# Altium PCB TelemetryBoard.PcbDoc
Units mm, origin at the board's own origin, x right, y up, seen from the top; angles counter-clockwise.
Board outline 136.75 x 63.75 mm, 4 copper layers (Top Layer, Internal Plane 1, Internal Plane 2, Bottom Layer), stack 1.57 mm thick; 63 components, 63 nets, 330 pads, 67 vias.
Unrouted connection lines stored in the file: 7.
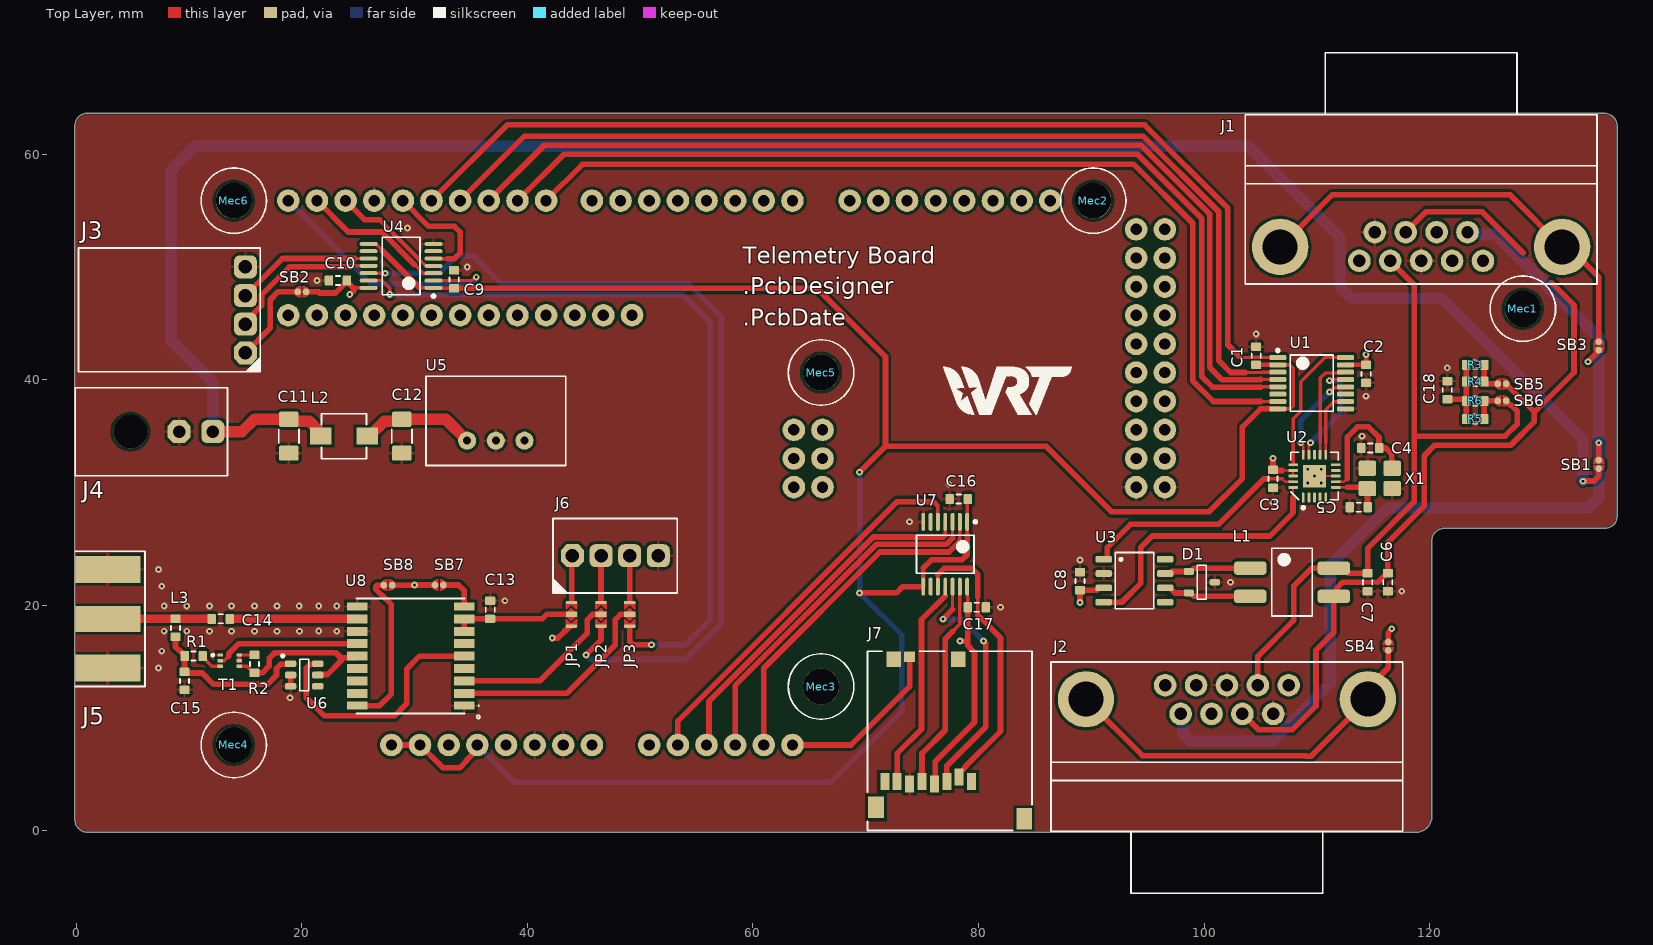
[diagram p0: Top Layer view]
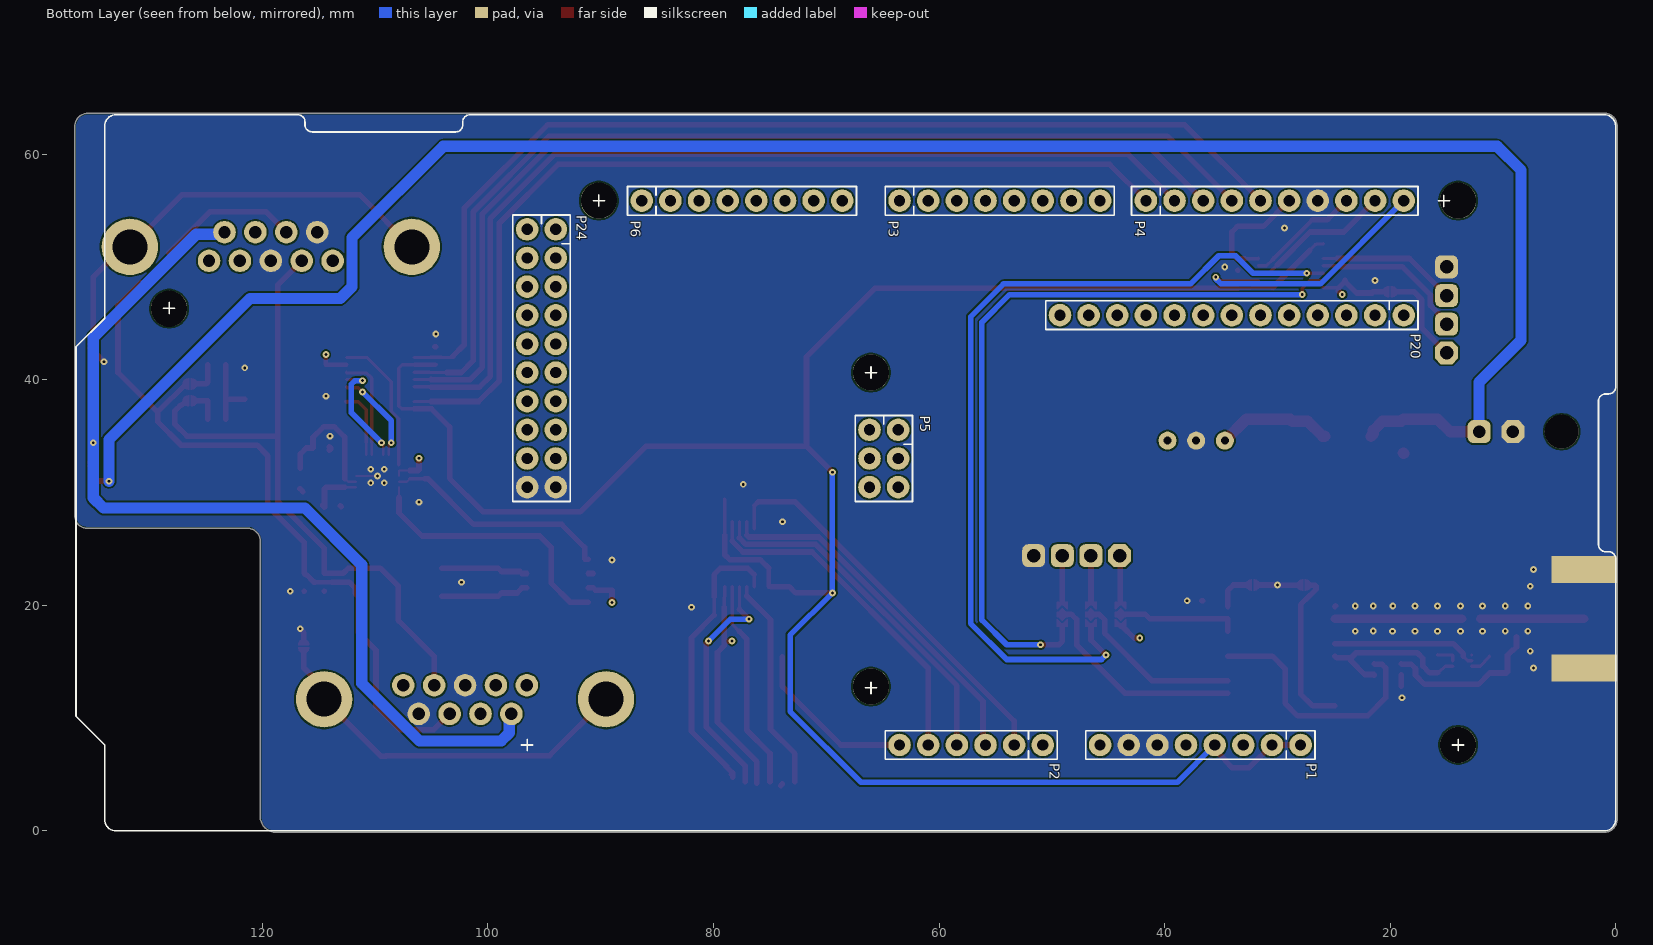
[diagram p1: Bottom Layer view, seen from below]
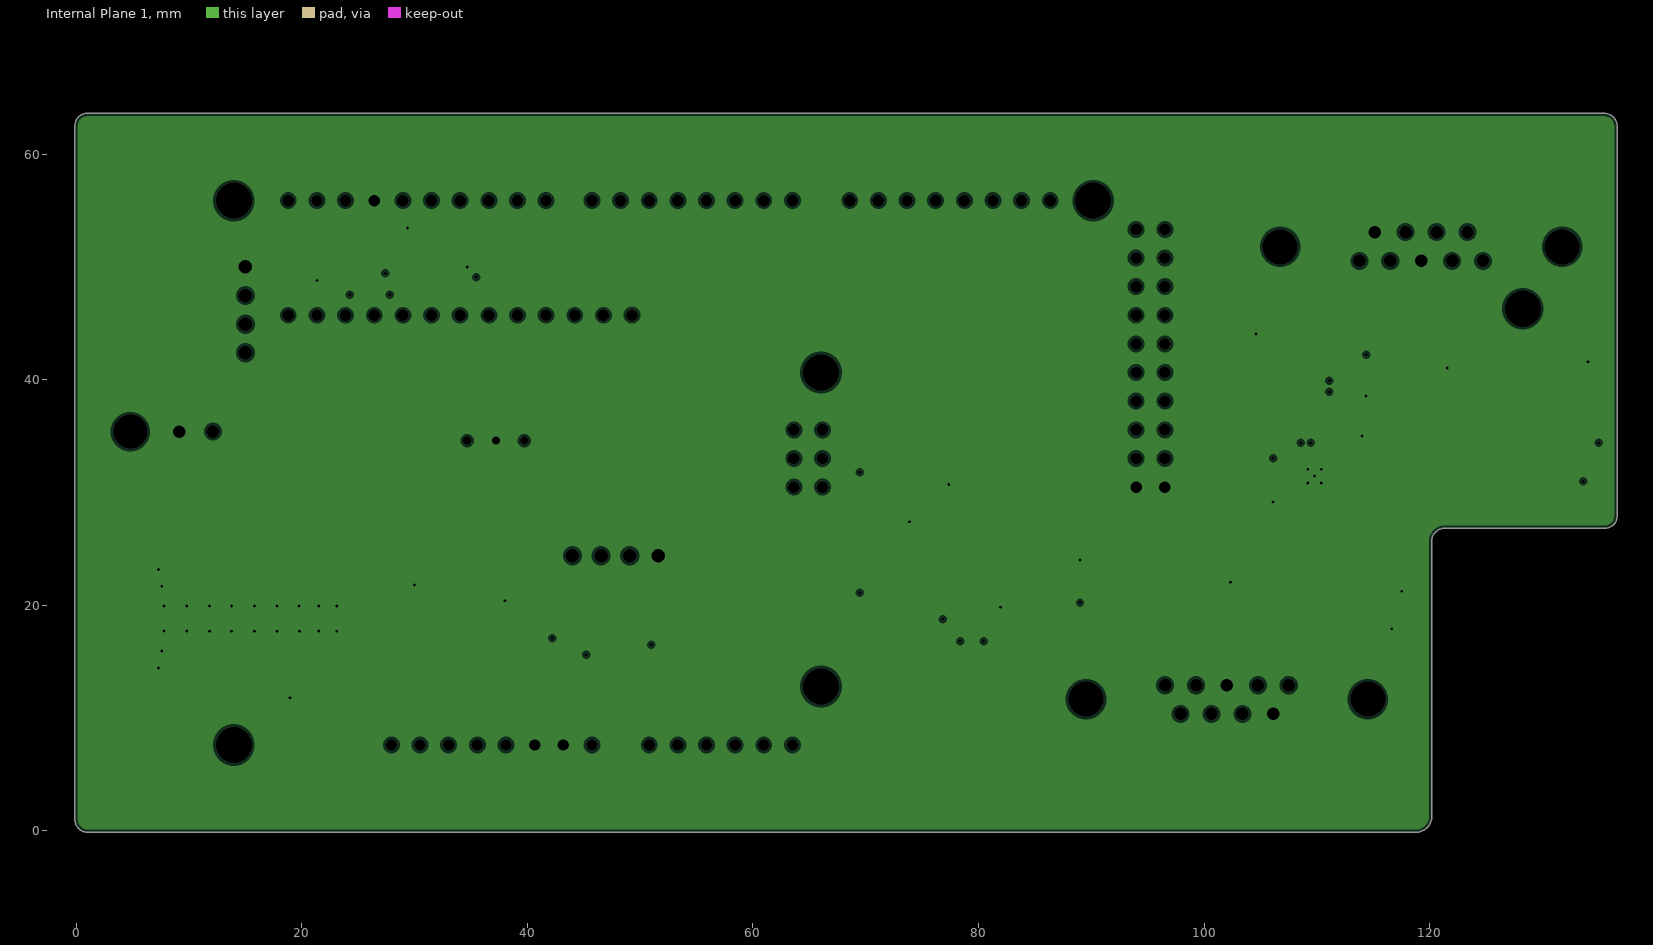
[diagram p2: Internal Plane 1, clearances drawn from the general rule]
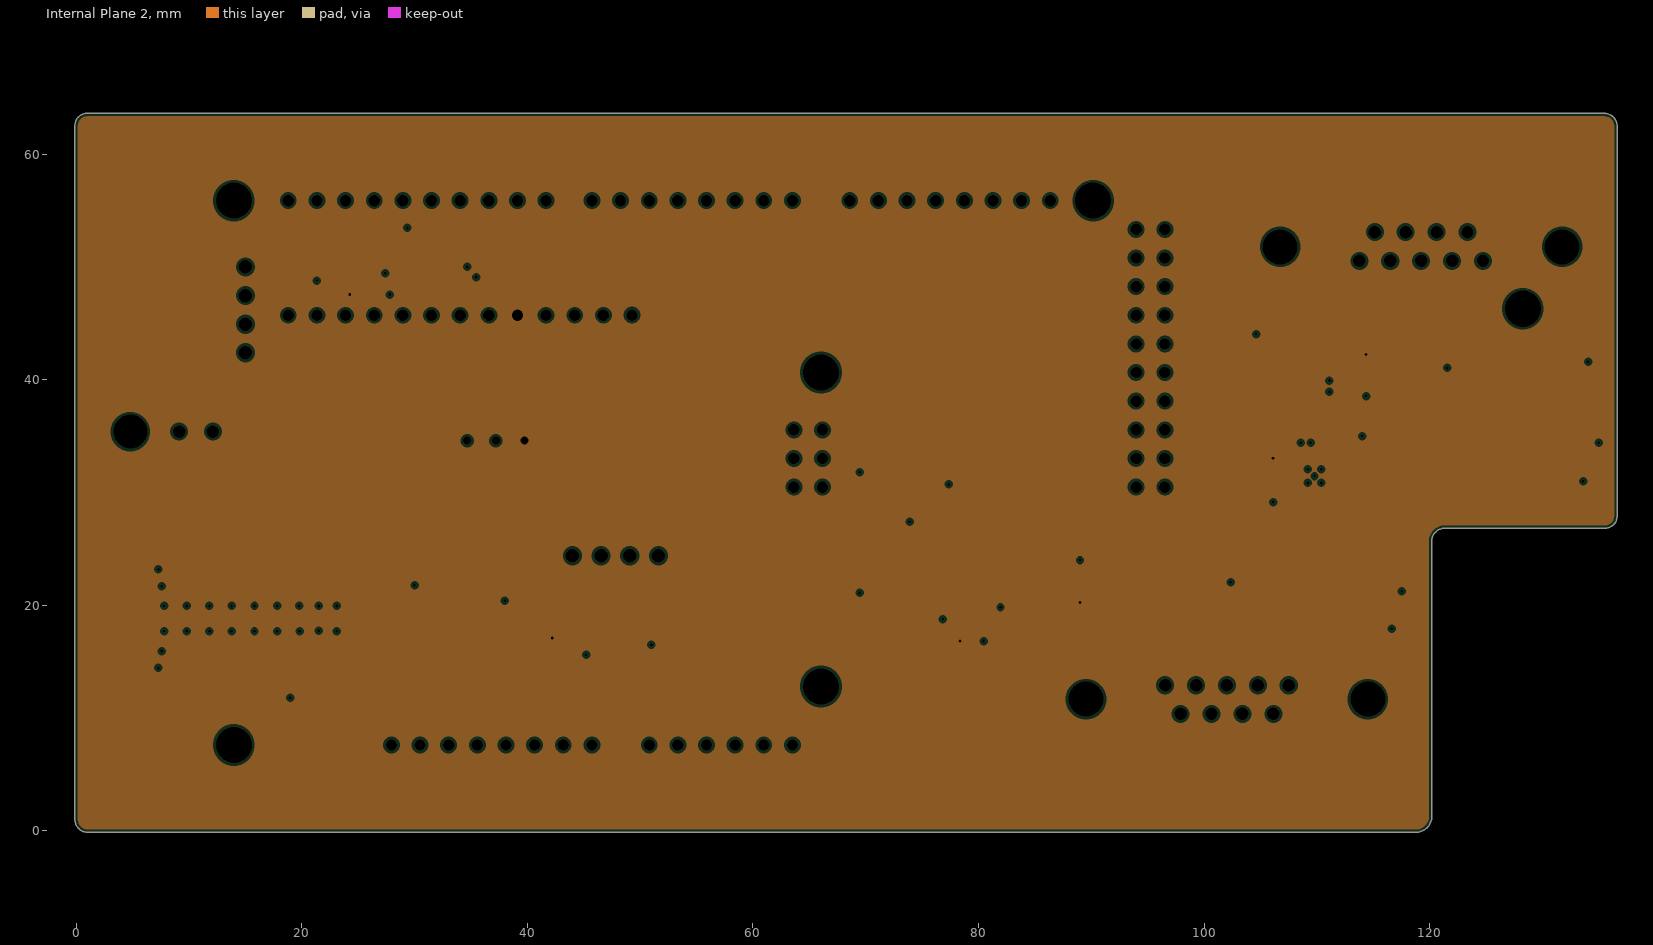
[diagram p3: Internal Plane 2, clearances drawn from the general rule]

## Layer stack, top to bottom
Top Solder: solder mask 0.01, Solder Resist, Dk 3.5
Top Layer: signal copper 0.035
Dielectric 1: prepreg 0.36, PR7826, Dk 4.32
Internal Plane 1: plane copper 0.035, net GND
Dielectric 3: core 0.71, FR-4, Dk 4.2
Internal Plane 2: plane copper 0.035, net +3.3
Dielectric 2: prepreg 0.36, PR7826, Dk 4.32
Bottom Layer: signal copper 0.035
Bottom Solder: solder mask 0.01, Solder Resist, Dk 3.5

## Board outline
1.016,-0.127 118.792,-0.127 ccw(c118.792,1.27) 120.189,1.27 120.189,25.686 cw(c121.332,25.686) 121.332,26.829 135.531,26.829 ccw(c135.531,27.925) 136.627,27.925 136.627,28.188 136.627,62.484 ccw(c136.5,62.484) 136.627,62.492 ccw(c136.501,62.5) 136.627,62.5 ccw(c135.5,62.5) 135.5,63.627 0.973,63.627 ccw(c0.973,62.527) -0.127,62.527 -0.127,1.016 ccw(c1.016,1.016)

## Design rules (kind name [scope] priority, off if disabled: settings)
AcuteAngle [All] p1 off: minimum=9.00000000000000E+0001 checktracksonly=TRUE
AssemblyTestPointUsage [All] p1 off:
AssemblyTestpoint [All] p1 off: testpointundercomponent=TRUE minsize=1.016 maxsize=2.54 preferedsize=1.524 minholesize=0 maxholesize=1.016 preferedholesize=0.813 testpointgrid=0.025 usegrid=TRUE gridtolerance=0 allowsidetop=TRUE allowsidebottom=TRUE
BoardOutlineClearance [All] p1 off: gap=0.25 ignorepadtopadclearanceinfootprint=FALSE
Clearance Clearance_2 [InNamedPolygon('GND_L01_P000')] p1: gap=0.254 ignorepadtopadclearanceinfootprint=FALSE except(0: Arc-Hole Track-Hole SMDPad-Hole THPad-Hole Via-Hole Fill-Hole Poly-Hole Region-Hole Text-Hole)
Clearance Clearance_1 [InNamedPolygon('GND_L01_P001')] p2: gap=0.254 ignorepadtopadclearanceinfootprint=FALSE except(0: Arc-Hole Track-Hole SMDPad-Hole THPad-Hole Via-Hole Fill-Hole Poly-Hole Region-Hole Text-Hole)
Clearance [All] p3: gap=0.15 ignorepadtopadclearanceinfootprint=FALSE except(0: Arc-Hole Track-Hole SMDPad-Hole THPad-Hole Via-Hole Fill-Hole Poly-Hole Region-Hole Text-Hole)
ComponentClearance [All] p1 off: gap=0.25 collisioncheckmode=3 verticalgap=0.25 showdistances=FALSE
DiffPairsRouting [All] p1 off: maxlimit=0.254 minlimit=0.254 mostfreqgap=0.254 toplayer_minwidth=0.381 toplayer_maxwidth=0.381 toplayer_prefwidth=0.381 bottomlayer_minwidth=0.381 bottomlayer_maxwidth=0.381 bottomlayer_prefwidth=0.381 maxuncoupledlength=12.7
FabricationTestPointUsage [All] p1 off: valid=0 allowmultiple=FALSE
FabricationTestpoint [All] p1 off: side=3 testpointundercomponent=TRUE minsize=1.016 maxsize=2.54 preferedsize=1.524 minholesize=0 maxholesize=1.016 preferedholesize=0.813 testpointgrid=0.025 allowsidetop=TRUE allowsidebottom=TRUE usegrid=TRUE gridtolerance=0
FanoutControl Fanout_BGA [IsBGA] p1 off: bgadir=Out bgaviamode=Centered fanoutstyle=Auto fanoutdirection=Alternating viagrid=0.025 // Fanout_BGA (Default Rule)
FanoutControl Fanout_LCC [IsLCC] p2 off: bgadir=Out bgaviamode=Centered fanoutstyle=Auto fanoutdirection=Alternating viagrid=0.025 // Fanout_LCC (Default Rule)
FanoutControl Fanout_SOIC [IsSOIC] p3 off: bgadir=Out bgaviamode=Centered fanoutstyle=Auto fanoutdirection=Alternating viagrid=0.025 // Fanout_SOIC (Default Rule)
FanoutControl Fanout_Small [(CompPinCount < 5)] p4 off: bgadir=Out bgaviamode=Centered fanoutstyle=Auto fanoutdirection=OutThenIn viagrid=0.025 // Fanout_Small (Default Rule)
FanoutControl Fanout_Default [All] p5 off: bgadir=Out bgaviamode=Centered fanoutstyle=Auto fanoutdirection=Alternating viagrid=0.025 // Fanout_Default (Default Rule)
Height [All] p1 off: minheight=0 maxheight=25.4 prefheight=12.7
HoleSize [All] p1: absolutevalues=TRUE maxlimit=3 minlimit=0.25 maxpercent=80.000 minpercent=20.000
HoleToHoleClearance [All] p1 off: gap=0.25 allowstackedmicrovias=TRUE
LayerPairs [All] p1 off: enforce=TRUE
MinimumAnnularRing [All] p1 off: minimumring=0.175
MinimumSolderMaskSliver [All] p1 off: minsoldermaskwidth=0
NetAntennae [All] p1 off: netantennaetolerance=0
PasteMaskExpansion [All] p1 off: expansion=0
PlaneClearance [All] p1: clearance=0.25
PlaneConnect [All] p1: planeconnectstyle=Direct reliefexpansion=0.5 reliefentries=4 reliefconductorwidth=0.25 reliefairgap=0.25
PolygonConnect PolygonConnect_7 [All vs IsNamedPolygon('GND_L04_P002')] p1: thpad.connectstyle=Relief thpad.reliefconductorwidth=0.254 thpad.reliefentries=4 thpad.polygonreliefangle="90 Angle" thpad.airgapwidth=0.254 smdpad.connectstyle=Relief smdpad.reliefconductorwidth=0.254 smdpad.reliefentries=4 smdpad.polygonreliefangle="90 Angle" smdpad.airgapwidth=0.254 via.connectstyle=Direct via.reliefconductorwidth=0.254 via.reliefentries=4 via.polygonreliefangle="90 Angle" via.airgapwidth=0.254
PolygonConnect PolygonConnect_6 [All vs IsNamedPolygon('GND_L01_P000')] p2: thpad.connectstyle=Relief thpad.reliefconductorwidth=0.254 thpad.reliefentries=4 thpad.polygonreliefangle="90 Angle" thpad.airgapwidth=0.254 smdpad.connectstyle=Relief smdpad.reliefconductorwidth=0.254 smdpad.reliefentries=4 smdpad.polygonreliefangle="90 Angle" smdpad.airgapwidth=0.254 via.connectstyle=Direct via.reliefconductorwidth=0.254 via.reliefentries=4 via.polygonreliefangle="90 Angle" via.airgapwidth=0.254
PolygonConnect PolygonConnect_5 [All vs IsNamedPolygon('GND_L01_P000')] p3: connectstyle=Relief reliefconductorwidth=0.254 reliefentries=4 polygonreliefangle="90 Angle" airgapwidth=0.254
PolygonConnect PolygonConnect_4 [All vs IsNamedPolygon('GND_L01_P000')] p4: thpad.connectstyle=Relief thpad.reliefconductorwidth=0.254 thpad.reliefentries=4 thpad.polygonreliefangle="90 Angle" thpad.airgapwidth=0.254 smdpad.connectstyle=Relief smdpad.reliefconductorwidth=0.254 smdpad.reliefentries=4 smdpad.polygonreliefangle="90 Angle" smdpad.airgapwidth=0.254 via.connectstyle=Direct via.reliefconductorwidth=0.254 via.reliefentries=4 via.polygonreliefangle="90 Angle" via.airgapwidth=0.254
PolygonConnect PolygonConnect_3 [All vs IsNamedPolygon('GND_L01_P001')] p5: thpad.connectstyle=Relief thpad.reliefconductorwidth=0.254 thpad.reliefentries=4 thpad.polygonreliefangle="90 Angle" thpad.airgapwidth=0.254 smdpad.connectstyle=Relief smdpad.reliefconductorwidth=0.254 smdpad.reliefentries=4 smdpad.polygonreliefangle="90 Angle" smdpad.airgapwidth=0.254 via.connectstyle=Direct via.reliefconductorwidth=0.254 via.reliefentries=4 via.polygonreliefangle="90 Angle" via.airgapwidth=0.254
PolygonConnect PolygonConnect_2 [All vs IsNamedPolygon('GND_L01_P001')] p6: thpad.connectstyle=Direct thpad.reliefconductorwidth=0.254 thpad.reliefentries=4 thpad.polygonreliefangle="90 Angle" thpad.airgapwidth=0.254 smdpad.connectstyle=Relief smdpad.reliefconductorwidth=0.254 smdpad.reliefentries=4 smdpad.polygonreliefangle="90 Angle" smdpad.airgapwidth=0.254 via.connectstyle=Relief via.reliefconductorwidth=0.254 via.reliefentries=4 via.polygonreliefangle="90 Angle" via.airgapwidth=0.254
PolygonConnect PolygonConnect_1 [All vs IsNamedPolygon('GND_L01_P001')] p7: connectstyle=Relief reliefconductorwidth=0.254 reliefentries=4 polygonreliefangle="90 Angle" airgapwidth=0.254
PolygonConnect [All] p8: connectstyle=Direct reliefconductorwidth=0.25 reliefentries=4 polygonreliefangle="90 Angle" airgapwidth=0.25
RoutingCorners [All] p1 off: cornerstyle=45-Degree minsetback=2.5 maxsetback=2.5
RoutingLayers [All] p1 off: top layer_v5=TRUE bottom layer_v5=TRUE
RoutingPriority [All] p1 off: routingpriority=0
RoutingTopology [All] p1 off: topology=Shortest
RoutingVias [All] p1: holewidth=0.25 width=0.6 viastyle="Through Hole" minholewidth=0.15 minwidth=0.5 maxholewidth=0.9 maxwidth=1.5 useviatemplates=TRUE viatemplateguid#1={857F750E-5D3C-416E-893E-D7E0D3E4223C} viatemplatename#1=v60h25m0mx0
SilkToBoardRegionClearance [All] p1 off:
SilkToSilkClearance [All] p1 off: silktosilkclearance=0
SilkToSolderMaskClearance [IsPad] p1 off: minsilkscreentomaskgap=0 clearancetoexposedcopper=TRUE
SolderMaskExpansion [All] p1: expansion=0 istentingtop=FALSE
Width [All] p1: maxlimit=4 minlimit=0.15 preferedwidth=0.5 minimp=50.000000 maximp=50.000000 favimp=50.000000
3 further rules are at their usual default settings.

## Classes and differential pairs
component class nRF7002-DK: C9 C10 C11 C12 J3 J4 L2 Mec1 Mec2 Mec3 Mec4 Mec5 Mec6 SB2 U4 U5
component class GPS-SD: C13 C14 C15 C16 C17 J5 J6 J7 JP1 JP2 JP3 L3 R1 R2 SB7 SB8 T1 U6 U7 U8
component class CanController: C1 C2 C3 C4 C5 C6 C7 C8 C18 D1 J1 J2 L1 R3 R4 R5 R6 SB1 SB3 SB4 SB5 SB6 U1 U2 U3 X1

## Components (designator, comment, footprint, x,y, rotation, side; value= is the part's Value field where it differs from the comment)
B1 "NRF52DK socket" "nRF5340DK SOCKET" 0,63.5 r0 bottom locked
C1 "100n" "CAPACITOR 1608 REFLOW" 104.618,42.123 r270 top
C2 "100n" "CAPACITOR 1608 REFLOW" 114.367,40.521 r90 top
C3 "100n" "CAPACITOR 1608 REFLOW" 106.118,31.223 r90 top
C4 "22pF" "CAPACITOR 1608 REFLOW" 114.738,33.948 r0 top
C5 "22pF" "CAPACITOR 1608 REFLOW" 113.717,28.7 r0 top
C6 "100pF" "CAPACITOR 1608 REFLOW" 116.3,22.048 r90 top
C7 "100pF" "CAPACITOR 1608 REFLOW" 114.5,22.048 r90 top
C8 "100n" "CAPACITOR 1608 REFLOW" 89,22.148 r270 top
C9 "100n" "CAPACITOR 1608 REFLOW" 33.5,48.9 r90 top
C10 "100n" "CAPACITOR 1608 REFLOW" 23.2,48.8 r0 top
C11 "10uF" "CAPACITOR 3216 REFLOW" 18.841,35 r270 top
C12 "10uF" "CAPACITOR 3216 REFLOW" 28.866,35 r270 top
C13 "100n" "CAPACITOR 1608 REFLOW" 36.7,19.6 r90 top
C14 "47pF" "CAPACITOR 1608 REFLOW" 12.8,18.8 r0 top
C15 "10nF" "CAPACITOR 1608 REFLOW" 9.6,13.3 r90 top
C16 "100n" "CAPACITOR 1608 REFLOW" 78.248,29.427 r0 top
C17 "100n" "CAPACITOR 1608 REFLOW" 79.848,19.827 r180 top
C18 "4.7nF" "CAPACITOR 1608 REFLOW" 121.57,39.086 r270 top
D1 "ESDCAN__-2BLY" "SOT23 P0.95 C1.6x3.0 H1.3" 99.8,22.048 r0 top
J1 "D-SUB 9 MALE GROUNDED" "D-SUB 9 MALE ANGLE" 119.249,55.987 r90 top
J2 "D-SUB 9 MALE GROUNDED" "D-SUB 9 MALE ANGLE" 102.029,7.474 r270 top
J3 "MOLEX 22057048" "MOLEX 22057048" 15,46.2 r270 top
J4 "MOLEX 43045-0200" "MOLEX 43045-0200" 10.615,35.4 r270 top
J5 "732511150" "SMA EDGE Molex 732511150" -0.1,18.8 r0 top locked
J6 "MOLEX 22272041" "MOLEX 22272041" 47.8,24.4 r180 top
J7 "GTC MEM20_1-00-195-00-A" "SD MICRO GCT MEM2051-00-195-00-A" 77.448,8.027 r0 top
JP1 "{Value}" "JUMPER3 SMD 1608" 43.9,19.2 r90 top
JP2 "{Value}" "JUMPER3 SMD 1608" 46.53,19.2 r90 top
JP3 "{Value}" "JUMPER3 SMD 1608" 49.07,19.2 r90 top
L1 "*" "L CM 2X B82793C EPCOS" 107.8,22.048 r0 top
L2 "*" TCK141 23.741,35 r0 top
L3 "27nH" "INDUCTOR 1608 REFLOW" 8.8,18 r90 top
Mec1 "" "Screw Hex Socket M3X5 Unconnected" 128.27,46.3 r0 top locked
Mec2 "" "Screw Hex Socket M3X5 Unconnected" 90.17,55.88 r0 top locked
Mec3 "" "Screw Hex Socket M3X5 Unconnected" 66.04,12.8 r0 top locked
Mec4 "" "Screw Hex Socket M3X5 Unconnected" 13.97,7.62 r0 top locked
Mec5 "" "Screw Hex Socket M3X5 Unconnected" 66.04,40.64 r0 top locked
Mec6 "" "Screw Hex Socket M3X5 Unconnected" 13.97,55.88 r0 top locked
R1 "10" "RESISTOR 1608 REFLOW" 10.4,15.5 r180 top
R2 "100k" "RESISTOR 1608 REFLOW" 15.8,14.809 r90 top
R3 "120" "RESISTOR 1608 REFLOW" 124.046,41.323 r0 top
R4 "120" "RESISTOR 1608 REFLOW" 124.046,39.836 r0 top
R5 "120" "RESISTOR 1608 REFLOW" 124.046,36.524 r0 top
R6 "120" "RESISTOR 1608 REFLOW" 124.046,38.124 r0 top
SB1 "*" "Solder Bridge 1mm Unconnected" 135,32.5 r90 top net-tie
SB2 "*" "Solder Bridge 1mm Unconnected" 20,47.8 r0 top net-tie
SB3 "*" "Solder Bridge 1mm Unconnected" 135,43 r90 top net-tie
SB4 "*" "Solder Bridge 1mm Unconnected" 116.329,16.374 r270 top net-tie
SB5 "*" "Solder Bridge 1mm Unconnected" 126.41,39.636 r0 top net-tie
SB6 "*" "Solder Bridge 1mm Unconnected" 126.41,38.131 r0 top net-tie
SB7 "*" "Solder Bridge 1mm Unconnected" 32.175,21.8 r0 top net-tie
SB8 "*" "Solder Bridge 1mm Unconnected" 27.647,21.791 r0 top net-tie
T1 "Si1016X" "SOT563F P0.5 C1.6x1.2 H0.6" 13.6,15.1 r0 top
U1 "TXB0106PWR" "TSSOP16 P0.65 C5.0x4.5 H1.1" 109.543,39.696 r0 top
U2 "MCP2515I/ML" "QFN20 P0.5 T2.05x2.05 C4.0x4.0 H0.85" 109.792,31.46 r90 top
U3 "SN65HVD232D" "SO8 P1.27 C4.0X5.0 H1.75" 93.825,22.183 r0 top
U4 "TXB0104PWR" "TSSOP14 P0.65 C4.4x5.0 H1.1" 28.8,50.1 r180 top
U5 "*" "TRACO TSR 1" 37.2,34.6 r0 top
U6 "SN74LVC2G17" "SOT23-6 P0.95 C1.5x3.0 H1.3" 20.204,13.819 r0 top
U7 "TXB0104PWR" "TSSOP14 P0.65 C4.4x5.0 H1.1" 77.048,24.527 r270 top
U8 "MAX-M10S-00B" MAXM10S00B 29.65,15.5 r0 top
X1 "*" "CRYSTAL C3.2x2.5 Kyocera CX3225SB" 115.578,31.248 r0 top

## Footprints (in the part's own frame and the unit in brackets; to place one, negate y for a bottom-side part, rotate by r counter-clockwise, add the part's x,y. Pads: shape width x height; smd on the part's side, far side on the other; paste and mask are expansions set on the pad)
"CAPACITOR 1608 REFLOW" [mm] "Capacitor SMD 1.6x0.8mm (0603-imperial)"
  rrect25% 0.75x0.9 smd: 1(-0.8,0) 2(0.8,0)
  silkscreen extent -0.2,-0.4 0.2,0.4, body extent -0.8,-0.4 0.8,0.4, height 0.8
"CAPACITOR 3216 REFLOW" [mm] "Capacitor SMD 3.2x1.6mm (1206-imperial)"
  rrect25% 1.35x1.75 smd: 1(-1.5,0) 2(1.5,0)
  silkscreen extent -0.6,-0.9 0.6,0.9, body extent -1.7,-0.9 1.7,0.9, height 1.6
"CRYSTAL C3.2x2.5 Kyocera CX3225SB" [mm] "CRYSTAL C3.2x2.5 Kyocera CX3225SB"
  rrect25% 1.55x1.35 smd: 1(-1.1,-0.9) 2(1.1,-0.9) 3(1.1,0.9) 4(-1.1,0.9)
  body extent -1.6,-1.3 1.6,1.3, height 0.6
"D-SUB 9 MALE ANGLE" [mm] "D-SUB9M HARTING"
  round 2 hole 1.1: 1(-5.44,-5.48) 2(-5.44,-2.74) 3(-5.44,0) 4(-5.44,2.74) 5(-5.44,5.48) 6(-2.9,-4.11) 7(-2.9,-1.37) 8(-2.9,1.37) 9(-2.9,4.11)
  round 5 hole 3.1: 10(-4.2,12.5) 11(-4.2,-12.5)
  silkscreen extent -7.5,-15.6 13,15.6, body extent -7.4,-15.6 13.8,15.6, height 13.65
"INDUCTOR 1608 REFLOW" [mm] "Inductor SMD 1.6x0.8mm (0603-imperial)"
  rrect25% 0.75x0.9 smd: 1(-0.8,0) 2(0.8,0)
  silkscreen extent -0.2,-0.4 0.2,0.4, body extent -0.8,-0.4 0.8,0.4, height 0.45
"JUMPER3 SMD 1608" [mm] "JUMPER SMD 3LEADS 1608 (0603-Imperial)"
  rrect50% 0.3x1 smd paste-0.8 mask-0.5: 1(-1.05,0) 3(1.05,0)
  rect 0.5x1 smd paste-0.8 mask-0.5: 2(0,0)
  Top Layer region: -1.1,0.5 -1.1,-0.5 -0.45,-0.5 -0.45,-0.4 -0.8,-0.05 -0.8,0.05 -0.45,0.4 -0.45,0.5
  Top Layer region: -0.25,0.35 -0.625,0 -0.25,-0.35 -0.25,-0.5 0.25,-0.5 0.25,-0.35 0.6,0 0.25,0.35 0.25,0.5 0.1,0.5 -0.25,0.5
  Top Layer region: 1.1,-0.5 1.1,0.5 0.45,0.5 0.45,0.4 0.8,0.05 0.8,-0.05 0.45,-0.4 0.45,-0.5
"L CM 2X B82793C EPCOS" [mm]
  rrect50% 2.9x1.2 smd: 1(-3.7,1.25) 2(-3.7,-1.25) 3(3.7,-1.25) 4(3.7,1.25)
  silkscreen extent -1.8,-3 1.8,3, body extent -3.55,-3 3.55,3, height 4.9
MAXM10S00B [mm]
  rect 1.8x0.7 smd: 1(4.75,-4.4) 9(4.75,4.4) 10(-4.75,4.4) 18(-4.75,-4.4)
  rect 1.8x0.8 smd: 2(4.75,-3.3) 3(4.75,-2.2) 4(4.75,-1.1) 5(4.75,0) 6(4.75,1.1) 7(4.75,2.2) 8(4.75,3.3) 11(-4.75,3.3) 12(-4.75,2.2) 13(-4.75,1.1) 14(-4.75,0) 15(-4.75,-1.1) 16(-4.75,-2.2) 17(-4.75,-3.3)
  silkscreen extent -4.8,-5.54 6.14,5.1, body extent -4.85,-5.05 4.85,5.05, height 2.5
"MOLEX 43045-0200" [mm] "Micro-Fit 3.0 Right Angle Header, 3.00mm Pitch, Dual Row, 2 Circuits"
  round 3 hole 3 unplated paste-25.4 mask-25.4: 0(0,-5.82)
  oct 2.032x2.032 hole 1.1: 1(0,-1.5)
  rrect50% 2.032x2.032 hole 1.1: 2(0,1.5)
  silkscreen extent -3.9,-10.7 3.9,2.8, body extent -3.57,-10.45 3.58,1.79, height 8.78
"MOLEX 22057048" [mil] "KK 254 Wire-to-Board Header, Right-Angle, 4 Circuits"
  oct 80x80 hole 47.24: 1(150,0)
  rrect50% 80x80 hole 47.24: 2(50,0) 3(-50,0) 4(-150,0)
  silkscreen extent -216,-583 216,51, body extent -200,-567 200,13, height 231
"MOLEX 22272041" [mil] "KK 254 Wire-to-Board Header, Vertical, 4 Circuits"
  oct 80x80 hole 47.24: 1(150,0)
  rrect50% 80x80 hole 47.24: 2(50,0) 3(-50,0) 4(-150,0)
  silkscreen extent -216,-130 218,130, body extent -200,-114 200,114, height 461
"nRF5340DK SOCKET" [mm] "nRF5340DK Dongle socket"
  round 2 hole 1: P1.1(27.941,55.88) P1.2(30.48,55.88) P1.3(33.021,55.88) P1.4(35.56,55.88) P1.5(38.101,55.88) P1.6(40.641,55.88) P1.7(43.181,55.88) P1.8(45.721,55.88) P2.1(50.801,55.88) P2.2(53.34,55.88) P2.3(55.881,55.88) P2.4(58.42,55.88) P2.5(60.961,55.88) P2.6(63.501,55.88) P3.1(63.501,7.62) P3.2(60.961,7.62) P3.3(58.421,7.62) P3.4(55.881,7.62) P3.5(53.341,7.62) P3.6(50.8,7.62) P3.7(48.26,7.62) P3.8(45.72,7.62) P4.1(41.657,7.62) P4.2(39.117,7.62) P4.3(36.577,7.62) P4.4(34.037,7.62) P4.5(31.497,7.62) P4.6(28.957,7.62) P4.7(26.417,7.62) P4.8(23.877,7.62) P4.9(21.336,7.62) P4.10(18.796,7.62) P5.1(63.627,27.94) P5.2(66.167,27.94) P5.3(63.627,30.48) P5.4(66.167,30.48) P5.5(63.627,33.02) P5.6(66.167,33.02) P6.1(86.361,7.62) P6.2(83.821,7.62) P6.3(81.281,7.62) P6.4(78.741,7.62) P6.5(76.201,7.62) P6.6(73.661,7.62) P6.7(71.121,7.62) P6.8(68.581,7.62) P20.1(18.797,17.78) P20.2(21.337,17.78) P20.3(23.877,17.78) P20.4(26.417,17.78) P20.5(28.957,17.78) P20.6(31.497,17.78) P20.7(34.037,17.78) P20.8(36.577,17.78) P20.9(39.117,17.78) P20.10(41.657,17.78) P20.11(44.197,17.78) P20.12(46.737,17.78) P20.13(49.277,17.768) P24.1(93.98,10.16) P24.2(96.52,10.16) P24.3(93.98,12.7) P24.4(96.52,12.7) P24.5(93.98,15.24) P24.6(96.52,15.24) P24.7(93.98,17.78) P24.8(96.52,17.78) P24.9(93.98,20.32) P24.10(96.52,20.32) P24.11(93.98,22.86) P24.12(96.52,22.86) P24.13(93.98,25.4) P24.14(96.52,25.4) P24.15(93.98,27.94) P24.16(96.52,27.94) P24.17(93.98,30.48) P24.18(96.52,30.48) P24.19(93.98,33.02) P24.20(96.52,33.02)
  silkscreen extent 0,0 136.53,63.5, body extent 17.53,6.35 97.79,57.15, height 8.5
"QFN20 P0.5 T2.05x2.05 C4.0x4.0 H0.85" [mm] "QFN20 P0.5 T2.05x2.0 C4.0x4.0 H0.85"
  rrect50% 0.85x0.25 smd: 1(-1.9,1) 2(-1.9,0.5) 3(-1.9,0) 4(-1.9,-0.5) 5(-1.9,-1) 11(1.9,-1) 12(1.9,-0.5) 13(1.9,0) 14(1.9,0.5) 15(1.9,1)
  rrect50% 0.25x0.85 smd: 6(-1,-1.9) 7(-0.5,-1.9) 8(0,-1.9) 9(0.5,-1.9) 10(1,-1.9) 16(1,1.9) 17(0.5,1.9) 18(0,1.9) 19(-0.5,1.9) 20(-1,1.9)
  rect 2x2 smd: 21(0,0)
  silkscreen extent -2.92,-2.1 2.1,2.1, body extent -2,-2 2,2, height 0.86
"RESISTOR 1608 REFLOW" [mm] "Resistor SMD 1.6x0.8mm (0603-imperial)"
  rrect25% 0.75x0.9 smd: 1(-0.8,0) 2(0.8,0)
  silkscreen extent -0.2,-0.4 0.2,0.4, body extent -0.77,-0.42 0.78,0.43, height 0.45
"Screw Hex Socket M3X5 Unconnected" [mm] "Screw Hex Socket M3X5 Unconnected BN610"
  round 3.2 hole 3.2 unplated paste+0 mask+0: 0(0,0)
  silkscreen extent -2.9,-2.9 2.9,2.9, body extent -2.75,-2.75 2.75,2.75, height 3.01
"SD MICRO GCT MEM2051-00-195-00-A" [mm] "SD MICRO GCT MEM2051-00-195-00-A"
  rect 1.4x1.9 smd: 0(-6.55,-5.95) 0(6.6,-6.95)
  rect 1.3x1.4 smd: 0(-4.95,7.2) 0(0.75,7.2)
  rect 0.8x1.5 smd: 1(1.94,-3.66) 2(0.84,-3.26) 3(-0.26,-3.66) 4(-1.36,-3.86) 5(-2.46,-3.66) 6(-3.56,-3.86) 7(-4.66,-3.66) 8(-5.76,-3.66)
  rect 1x0.95 smd: 9(-3.56,7.425)
  silkscreen extent -7.3,-8 7.3,7.9, body extent -7.05,-11.27 7.05,7.57, height 2
"SMA EDGE Molex 732511150" [mm] "Connector SMA, Board edge mount, SMA EDGE Molex 732511150"
  rect 5.8x2.3 smd: 1(2.9,0)
  rect 5.8x2.4 smd: 2(2.9,-4.35) 2(2.9,4.38)
  rect 5.8x2.4 smd far side: 2(2.9,-4.35) 2(2.9,4.38)
  silkscreen extent 0,-6 6.2,6, body extent -9.6,-4.76 4.67,4.76, height 4.36
"SO8 P1.27 C4.0X5.0 H1.75" [mm] "8-Pin Small Outline Integrated Circuit 1.27 mm Pitch, IPC Medium Density"
  rrect50% 1.45x0.6 smd: 1(-2.725,1.905) 2(-2.725,0.635) 3(-2.725,-0.635) 4(-2.725,-1.905) 5(2.725,-1.905) 6(2.725,-0.635) 7(2.725,0.635) 8(2.725,1.905)
  silkscreen extent -1.7,-2.5 1.7,2.5, body extent -3,-2.45 3,2.45, height 1.75
"Solder Bridge 1mm Unconnected" [mm] "Solder Bridge Unconnected by default, Solderable"
  round 0.6 smd paste-0.8 mask+0: 1(-0.375,0) 2(0.375,0)
  Top Layer region: -0.075,0.5 -0.175,0.5 -0.675,0 -0.175,-0.5 -0.075,-0.5
  Top Layer region: 0.075,-0.5 0.175,-0.5 0.675,0 0.175,0.5 0.075,0.5
  Top Layer lines w0.2: -0.175,0.4 ccw(c-0.175,0) -0.175,-0.4 ; 0.175,0.4 cw(c0.175,0) 0.175,-0.4
"SOT23 P0.95 C1.6x3.0 H1.3" [mm] "SOT23, 3-Leads, Body 1.6x3.0mm, Pitch 0.95mm, IPC Medium Density"
  rrect50% 0.9x0.6 smd: 1(-1.15,0.95) 2(-1.15,-0.95) 3(1.15,0)
  silkscreen extent -0.4,-1.5 0.4,1.5, body extent -1.4,-1.45 1.4,1.45, height 1.3
"SOT23-6 P0.95 C1.5x3.0 H1.3" [mm] "SOT23, 6-Leads, Body 1.6x3.0mm, Pitch 0.95mm, IPC Medium Density"
  rrect50% 1x0.6 smd: 1(-1.2,1) 2(-1.2,0) 3(-1.2,-1) 4(1.2,-1) 5(1.2,0) 6(1.2,1)
  silkscreen extent -2,-1.4 0.4,1.8, body extent -1.4,-1.45 1.4,1.45, height 1.45
"SOT563F P0.5 C1.6x1.2 H0.6" [mm] "SOT563, 6-Leads, Body 1.6x1.2mm, Pitch 0.5mm, Height 0.60mm"
  rect 0.492x0.3 smd: 1(-0.834,0.5) 2(-0.834,0) 3(-0.834,-0.5) 4(0.834,-0.5) 5(0.834,0) 6(0.834,0.5)
  silkscreen extent -1.6,0.39 -1.4,0.59, body extent -0.81,-0.8 0.81,0.8, height 0.6
TCK141 [mm] "Inductor"
  rect 1.9x1.5 smd mask+0: 1(-2.05,0) 2(2.05,0)
  silkscreen extent -2,-2 2,2, body extent -2.35,-2 2.35,2, height 2.1
"TRACO TSR 1" [mm] "DC/DC Converter"
  round 1.6 hole 0.7: 1(-2.54,0) 2(0,0) 3(2.54,0)
  silkscreen extent -6.2,-2.2 6.2,5.7, body extent -6,-2 6,5.5, height 10.5
"TSSOP14 P0.65 C4.4x5.0 H1.1" [mm] "TSSOP, 14-Leads, Body 5x4.4mm, Pitch 0.65mm, IPC Medium Density"
  oval 1.6x0.35 smd: 1(-2.875,1.95) 2(-2.875,1.3) 3(-2.875,0.65) 4(-2.875,0) 5(-2.875,-0.65) 6(-2.875,-1.3) 7(-2.875,-1.95) 8(2.875,-1.95) 9(2.875,-1.3) 10(2.875,-0.65) 11(2.875,0) 12(2.875,0.65) 13(2.875,1.3) 14(2.875,1.95)
  silkscreen extent -3,-2.55 1.68,2.8, body extent -2.25,-2.55 2.25,2.55, height 1.11
"TSSOP16 P0.65 C5.0x4.5 H1.1" [mm] "TSSOP-16 NXP"
  rrect50% 1.5x0.45 smd: 1(-3,2.275) 2(-3,1.625) 3(-3,0.975) 4(-3,0.325) 5(-3,-0.325) 6(-3,-0.975) 7(-3,-1.625) 8(-3,-2.275) 9(3,-2.275) 10(3,-1.625) 11(3,-0.975) 12(3,-0.325) 13(3,0.325) 14(3,0.975) 15(3,1.625) 16(3,2.275)
  silkscreen extent -3.12,-2.5 1.9,3.02, body extent -2.25,-2.5 2.25,2.5, height 1.1

## Part data
B1: library part "nRF5340DK Socket", "nRF53 development kit"
C1 C2 C3 C4 C5 C6 C7 C8 C9 C10 C11 C12 C13 C14 C15 C16 C17 C18: library part Capacitor, "Capacitor"
D1: library part "Diode ESDCAN__-2BLY", "Automotive dual-line TVS diode"
J1 J2: "D-Subminiature 9 way Plug Right Angle"
J3: "KK 254 Wire-to-Board Header, Right-Angle, 4 Circuits"
J4: "Micro-Fit 3.0 Right-Angle Header, 3.00mm, Dual Row, 2 Circuits"
J5: library part "SMA EDGE Molex 732511150", "SMA EDGE Molex 732511150"
J6: "KK 254 Wire-to-Board Header, Vertical, 4 Circuits"
J7: library part "SD-MICRO GTC MEM20_1-00-195-00-A", "SD Card Micro", Package=None, Availability=Warning, Check_prices=https://www.snapeda.com/parts/MEM2051-00-195-00-A/Global%20Connector%20Technology/view-part/779220/?ref=eda, MF="Global Connector Technology", MP=MEM2051-00-195-00-A, Price=None, Purchase-URL=https://pricing.snapeda.com/search/part/MEM2051-00-195-00-A/?ref=eda, SnapEDA_Link=https://www.snapeda.com/parts/MEM2051-00-195-00-A/Global%20Connector%20Technology/view-part/779220/?ref=snap
JP1 JP2 JP3: library part "JUMPER 3 POS", "JUMPER 3 POS"
L1: library part "L CM 2X B82793C0 EPCOS", "Inductor Common Mode Filter"
L2 L3: library part Inductor, "Inductor"
Mec1 Mec2 Mec3 Mec4 Mec5 Mec6: library part "Screw Hex Socket Unconnected", "Screw Hex Socket Unconnected BN610"
R1 R2 R3 R4 R5 R6: library part Resistor, "Resistor"
SB1 SB2 SB3 SB4 SB5 SB6 SB7 SB8: library part "Solderbridge Unconnected", "Solderbridge Unconnected"
T1: "Complementary N- and P-Channel 20 V (D-S) MOSFET"
U1: "6-Bit Bidirectional Level-Shifting and Voltage Translator / With Auto-Direction Sensing and ±15-kV ESD Protection"
U2: "Stand-Alone CAN Controller with SPI Interface"
U3: "CAN Bus Transceiver 3V3"
U4 U7: "4-Bit Bidirectional Voltage-Level Translator With utomatic Direction Sensing and ±15-kV ESD Protection"
U5: library part "TRACO TSR 1", "DC/DC Converter"
U6: "Dual Schmitt-Trigger Buffer"
U8: "Standard precision GNSS module"
X1: library part "Crystal C3.2x2.5 Kyocera CX3225SB", "Crystal C3.2x2.5 Kyocera CX3225SB"

## Via types
v1: diameter 0.6, hole 0.25, Top Layer to Bottom Layer, 67 vias

## Nets (pads, with @x,y where several pads share a name; then routed paths per layer and width w, separated by ;. In a path a pad name is that pad's centre, name@x,y a point inside that pad or via, vN(x,y) a via of type N, cw(c..) or ccw(c..) an arc to the next point about the centre after c; other vN are vias at no path point)
+1.8: B1.P1.1 B1.P1.2 B1.P1.4 C1.2 C9.1 C16.2 U1.2 U1.8 U4.1 U4.8 U7.1 U7.8 | length 203.9
  Top Layer w0.2: C1.2 C1.2@104.62,41.322 ; U1.2@106.542,41.322 U1.2
  Top Layer w0.3: U4.8@25.915,52.04 U4.8 25.935,52.04 26.573,52.04 26.739,51.875 26.747,51.875 27.122,51.5 27.125,51.5 ; 30.44,48.16 31.665,48.16 U4.1 32.314,48.15 32.364,48.1 C9.1 ; U7.8@74.948,21.652 U7.8 ; 78.998,26.227 U7.1 79.008,27.412 79.008,29.387 C16.2 ; U1.8 107.658,37.421 107.892,37.655 107.892,41.023 107.594,41.321 U1.2
  Top Layer w0.4: U7.8 75.098,23.297 ; C1.2@104.62,41.322 U1.2@106.542,41.322
  Top Layer w0.5: 27.125,51.5 27.125,51.475 30.44,48.16 ; B1.P1.1 B1.P1.2 32.5,5.6 34.007,5.6 34.566,6.159 34.566,6.22 35.56,7.214 B1.P1.4 ; C9.1 65.7,48.1 71.754,42.046 71.754,34.1 ; v1(69.454,21.1) 72.723,21.1 73.276,21.652 U7.8@74.948,21.652 ; v1(69.454,31.8) 71.754,34.1 ; 75.098,23.297 75.828,24.027 78.538,24.027 78.998,24.487 78.998,26.227 ; U1.8 104.997,37.421 103.399,35.823 103.399,31.247 100.452,28.3 91.8,28.3 86,34.1 71.754,34.1
  Bottom Layer w0.5: B1.P1.4 38.88,4.3 66.9,4.3 73.2,10.6 73.2,17.354 v1(69.454,21.1) v1(69.454,31.8)
+3.3: B1.P20.9 C2.2 C3.2 C8.2 C10.2 C17.2 J7.4 JP1.1 SB2.2 U1.15 U2.17 U2.18 U3.3 U4.14 U5.3 U7.14 | length 38.5
  Top Layer w0.2: 106.918,31.96 U2.17 U2.18
  Top Layer w0.3: 24.575,48.15 U4.14 ; J7.4 J7.4@76.148,4.227 ; U7.14 79.008,21.643 79.008,20.768 79.048,20.727 C17.2
  Top Layer w0.4: U1.15 C2.2 v1(114.367,42.237)
  Top Layer w0.5: SB2.2 21.5,47.8 21.6,47.7 22.975,47.7 C10.2@24,48.725 ; C10.2 C10.2@24,48.725 ; v1(24.25,47.55) 24.575,47.875 24.575,48.15 C10.2@24,48.725 ; v1(42.2,17.1) 42.7,17.1 43.75,18.15 JP1.1 ; J7.4@76.148,4.227 76.148,6.127 79.648,9.627 79.648,15.827 79.048,16.427 79.048,16.827 ; v1(78.363,16.827) 79.048,16.827 ; C17.2 79.048,16.827 ; v1(89,20.248) C8.2 90.475,21.348 90.675,21.548 U3.3 ; v1(106.118,33.043) C3.2 106.182,31.96 106.918,31.96
+3.3-GPS: C13.1 JP1.2 U8.7 U8.8 | length 10.8
  Top Layer w0.5: U8.7 U8.8 C13.1 41.3,18.8 41.7,19.2 JP1.2
GND: B1.P1.6 B1.P1.7 B1.P4.7 B1.P24.19 B1.P24.20 C1.1 C2.1 C3.1 C4.1 C5.1 C6.1 C7.1 C8.1 C9.2 C10.1 C11.2 C12.2 C13.2 C15.1 C16.1 C17.1 C18.1 D1.3 J1.3 J1.9 J2.3 J2.9 J3.4 J4.1 J5.2 J6.4 J7.6 SB3.1 SB4.1 SB7.1 SB8.2 T1.1 U1.9 U2.8 U2.21 U3.2 U4.7 U5.2 U6.2 U6.3 U7.7 U8.1 U8.10 U8.12 X1.2 X1.4 | length 11.2
  Top Layer w0.2: v1(109.792,31.46) U2.8
  Top Layer w0.3: T1.1 T1.1@12.783,15.6
  Top Layer w0.5: U6.3 U6.2 ; U8.10@24.85,19.95 U8.10 ; SB8.2 29.991,21.791 v1(30,21.8) SB7.1 ; C13.2@36.625,20.4 C13.2 ; J7.6 J7.6@74.038,4.017 ; U3.2@90.675,22.818 U3.2 ; C1.1 C1.1@104.693,42.923 ; C5.1@113.006,28.752 C5.1@113.081,28.827 ; C4.1@114.059,34.069 C4.1 113.938,33.873 C4.1@114.063,33.748 ; SB4.1 116.329,17.588 116.643,17.902 v1(116.643,17.929) ; X1.2@116.415,30.085 X1.2 ; v1(134.05,41.6) 135,42.55 SB3.1
  Top Layer w1: C11.2@18.796,33.456 C11.2
  other v1: 18.954,11.8 7.287,14.45 7.573,15.937 7.79,17.71 9.8,17.71 11.8,17.7 13.77,17.7 15.8,17.7 17.8,17.7 19.8,17.7 23.1,17.7 21.502,17.732 81.949,19.827 7.79,19.95 9.8,19.95 11.8,19.95 13.77,19.95 15.8,19.95 17.8,19.95 19.759,19.95 21.502,19.95 23.1,19.95 38,20.4 117.525,21.248 7.573,21.689 102.349,22.048 7.287,23.18 89,24.008 73.888,27.412 106.118,29.148 77.369,30.727 109.192,30.86 110.392,30.86 109.192,32.06 110.392,32.06 114.011,35 114.367,38.547 121.57,41.057 104.618,44.054 21.337,48.8 34.66,50.01 29.366,53.463
NetB1_P2.2: B1.P2.2 U7.5 | length 35.5
  Top Layer w0.3: U7.5@76.398,26.764 U7.5 76.398,28.817
  Top Layer w0.4: 76.088,29.127 76.398,28.817
  Top Layer w0.5: B1.P2.2 53.34,9.74 72.8,29.2 76.016,29.2 76.088,29.127
NetB1_P2.3: B1.P2.3 U7.4 | length 32.2
  Top Layer w0.3: 77.048,26.227 U7.4
  Top Layer w0.5: B1.P2.3 56.1,7.839 56.1,11.49 70.664,26.054 76.862,26.054 77.035,26.227
NetB1_P2.4: B1.P2.4 U7.3 | length 31.4
  Top Layer w0.3: 77.698,25.977 U7.3
  Top Layer w0.5: B1.P2.4 58.42,12.891 70.934,25.404 77.144,25.404 77.698,25.958 77.698,25.977
NetB1_P2.5: B1.P2.5 U7.2 | length 30.6
  Top Layer w0.3: 78.348,25.727 U7.2
  Top Layer w0.5: B1.P2.5 60.961,14.421 71.267,24.727 77.387,24.727 78.348,25.689 78.348,25.727
NetB1_P2.6: B1.P2.6 J7.9 | length 15.2
  Top Layer w0.5: B1.P2.6 68.708,7.62 73.888,12.8 J7.9
NetB1_P4.1: B1.P4.1 U1.7 | length 83.1
  Top Layer w0.3: 105.018,38.071 U1.7
  Top Layer w0.5: B1.P4.1 44.877,59.1 93.781,59.1 99,53.881 99,39.9 100.829,38.071 105.018,38.071
NetB1_P4.2: B1.P4.2 U1.5 | length 85.9
  Top Layer w0.3: 105.018,39.371 U1.5
  Top Layer w0.5: B1.P4.2 43.237,60 94.1,60 99.8,54.3 99.8,40.3 100.752,39.348 105.018,39.348
NetB1_P4.3: B1.P4.3 U1.4 | length 88.6
  Top Layer w0.3: 105.018,40.021 U1.4
  Top Layer w0.5: B1.P4.3 41.497,60.8 94.4,60.8 100.5,54.7 100.5,41.1 101.602,39.998 104.995,39.998 105.018,40.021
NetB1_P4.4: B1.P4.4 U1.3 | length 91.3
  Top Layer w0.3: 103.641,40.648 105.138,40.648 105.16,40.671 U1.3
  Top Layer w0.5: B1.P4.4 39.757,61.6 94.6,61.6 101.3,54.9 101.3,41.7 102.352,40.648 103.64,40.648
NetB1_P4.5: B1.P4.5 U1.1 | length 93.3
  Top Layer w0.3: 103.229,41.971 104.072,41.971 104.099,41.998 105.138,41.998 105.165,41.971 U1.1
  Top Layer w0.5: B1.P4.5 38.217,62.6 94.72,62.6 102.1,55.22 102.1,43.1 103.1,42.1
NetB1_P4.6: B1.P4.6 U4.5 | length 10.7
  Top Layer w0.3: U4.5@31.685,50.76 U4.5 31.685,50.74 32.896,50.74 32.9,50.736
  Top Layer w0.5: B1.P4.6 31.236,53.6 33.537,53.6 34.037,53.1 34.037,51.237 33.536,50.736 32.9,50.736
NetB1_P4.8: B1.P4.8 U4.4 | length 10.2
  Top Layer w0.3: 26.881,54.2 26.928,54.2 ; 30.426,50.655 30.971,50.11 31.665,50.11 U4.4
  Top Layer w0.4: 26.881,54.2 30.321,50.76 30.321,50.736 30.414,50.644
  Top Layer w0.5: B1.P4.8 25.556,54.2 26.881,54.2
NetB1_P4.9: B1.P4.9 U4.3 | length 13
  Top Layer w0.3: 30,50.2 30.75,49.45 U4.3
  Top Layer w0.5: B1.P4.9 24.116,53.1 27.1,53.1 30,50.2
NetB1_P4.10: B1.P4.10 U4.2 | length 24
  Top Layer w0.3: U4.2 35.079,48.8 35.379,49.1 v1(35.46,49.1)
  Bottom Layer w0.5: B1.P4.10 26.176,48.5 35,48.5 35.46,48.96 v1(35.46,49.1)
NetC4_2: C4.2 U2.7 X1.3 | length 11.9
  Top Layer w0.2: U2.7 112.418,30.96 112.682,31.223 112.708,31.223
  Top Layer w0.5: 112.708,31.223 112.708,34.923 113.608,35.823 114.585,35.823 115.511,34.898 115.511,33.975 C4.2 116.108,33.948 116.628,33.428 X1.3@116.628,32.148
NetC5_2: C5.2 U2.6 X1.1 | length 4.6
  Top Layer w0.2: U2.6 112.708,30.46
  Top Layer w0.5: 112.708,30.46 114.367,30.46 X1.1 114.497,30.329 114.497,28.719 C5.2 ; C5.2@114.661,28.816 C5.2@114.661,28.891
NetC6_2: C6.2 J1.8 J2.8 L1.3 SB5.2 | length 77.9
  Top Layer w0.4: 113.8,22.048 115.3,22.048
  Top Layer w0.5: J2.8 104.799,8.974 107.829,8.974 109.929,11.074 109.929,16.017 111.5,17.588 L1.3 111.775,21.073 111.775,21.548 112.275,22.048 113.8,22.048 ; 115.3,22.048 115.425,22.048 116.1,22.723 116.175,22.723 C6.2 116.3,25.595 119.525,28.82 119.525,33.267 120.448,34.19 127.196,34.19 129.292,36.286 129.292,37.129 ; J1.8 119.692,54.9 124.658,54.9 128.292,51.266 ; SB5.2 129.292,37.129 ; 130.803,48.617 132.8,46.62 132.8,40.636 129.292,37.129
NetC7_2: C7.2 J1.4 J2.4 L1.4 SB6.2 | length 59.9
  Top Layer w0.5: J2.4 104.769,15.479 107.94,18.65 107.94,21.688 109.55,23.298 L1.4 112.377,23.298 112.827,22.848 C7.2 114.5,25.048 118.642,29.19 118.642,35 ; J1.4 118.642,48.415 118.642,35 ; SB6.2 127.185,37.731 127.263,37.731 127.77,37.224 127.77,36.07 126.7,35 118.642,35
NetC12_1: C12.1 L2.2 U5.1 | length 10.3
  Top Layer w1: L2.2 25.991,35 27.316,36.325 28.691,36.325 C12.1 32.76,36.5 U5.1
NetC14_1: C14.1 J5.1 L3.2 | length 9.2
  Top Layer w0.77: J5.1 L3.2 C14.1
NetC14_2: C14.2 U8.11 | length 11.3
  Top Layer w0.77: C14.2 U8.11
NetC15_2: C15.2 L3.1 R1.2 U6.1 | length 14.4
  Top Layer w0.5: L3.1 8.8,16.3 9.093,16.007 9.168,16.007 9.6,15.575 R1.2 C15.2 9.705,13.995 11.164,13.995 12.169,12.99 16.94,12.99 17.75,13.8 17.75,14.4 18.119,14.769 18.954,14.769 U6.1
NetC18_2: C18.2 R3.1 R4.1 R5.1 R6.1 | length 6.5
  Top Layer w0.5: C18.2 123.121,38.286 R6.1@123.246,38.161 ; R5.1 R6.1 R6.1@123.246,38.161 ; R3.1 R4.1 R6.1@123.246,38.161
NetD1_1: D1.1 L1.1 U3.7 | length 7.7
  Top Layer w0.5: U3.7 96.975,22.818 97.155,22.998 D1.1 98.8,22.998 99.1,23.298 L1.1
NetD1_2: D1.2 L1.2 U3.6 | length 7.9
  Top Layer w0.5: U3.6 96.975,21.548 97.425,21.098 D1.2 98.8,21.098 99.1,20.798 L1.2
NetJ1_6: J1.6 J2.6 SB1.2 | length 85.3
  Top Layer w0.5: SB1.2 v1(135,34.415)
  Bottom Layer w1: J2.6 98.11,10.183 98.11,8.693 98.829,7.974 106.072,7.974 111.201,13.102 111.201,23.601 116.225,28.625 134.089,28.625 135,29.536 v1(135,34.415) 135,43.761 125.859,52.901 123.545,52.901 J1.6
NetJ1_10: J1.10 J1.11 SB3.2 | length 37.9
  Top Layer w0.5: J1.10 111.353,56.391 127.145,56.391 J1.11 ; J1.11@132.8,51.5 132.8,51.304 135,49.104 SB3.2
NetJ2_10: J2.10 J2.11 SB4.2 | length 34.3
  Top Layer w0.5: J2.11 94.529,6.674 109.004,6.674 109.059,6.619 109.474,6.619 J2.10 114.529,12.67 116.329,14.47 SB4.2
NetJ3_1: J3.1 SB2.1 | length 8.3
  Top Layer w0.5: J3.1 17.2,44.59 17.2,47.1 17.9,47.8 SB2.1
NetJ3_2: J3.2 U4.11 | length 13.8
  Top Layer w0.2: 24.4,50.01 24.49,50.1
  Top Layer w0.3: 24.49,50.1 U4.11
  Top Layer w0.5: J3.2 15,45.07 15.766,45.836 15.766,45.936 16.416,46.586 16.416,47.516 18.91,50.01 24.4,50.01
NetJ3_3: J3.3 U4.10 | length 12.3
  Top Layer w0.3: 24.7,50.75 U4.10
  Top Layer w0.5: J3.3 18.28,50.75 24.7,50.75
NetJ6_1: J6.1 JP1.3 | length 4.2
  Top Layer w0.5: JP1.3 43.945,20.295 43.945,24.355 J6.1
NetJ6_2: J6.2 JP2.3 | length 4.1
  Top Layer w0.5: JP2.3 J6.2
NetJ6_3: J6.3 JP3.3 | length 4.1
  Top Layer w0.5: JP3.3 J6.3
NetJ7_2: J7.2 U7.10 | length 25.8
  Top Layer w0.3: U7.10 76.398,22.727 ; J7.2 J7.2@78.538,5.017 ; 79.948,19.127 79.948,20.768
  Top Layer w0.5: 76.398,22.727 76.968,23.297 79.388,23.297 79.948,22.737 79.948,20.768 ; J7.2 78.288,5.117 78.363,5.192 78.848,5.677 78.848,5.727 81.948,8.827 81.948,17.127 79.948,19.127
NetJ7_3: J7.3 U7.12 | length 21.6
  Top Layer w0.3: 77.698,19.627 U7.12
  Top Layer w0.5: v1(76.845,18.774) 77.698,19.627 ; J7.3 77.188,5.767 80.648,9.227 80.648,16.627 v1(80.448,16.827)
  Bottom Layer w0.5: v1(76.845,18.774) 78.501,18.774 v1(80.448,16.827)
NetJ7_5: J7.5 U7.13 | length 18.7
  Top Layer w0.3: 77.698,17.677 78.348,18.327 U7.13
  Top Layer w0.5: J7.5 74.988,6.867 77.048,8.927 77.048,17.027 77.698,17.677
NetJ7_7: J7.7 U7.11 | length 19
  Top Layer w0.3: 77.048,20.827 U7.11
  Top Layer w0.5: J7.7 72.788,6.856 74.948,9.016 74.948,18.727 77.048,20.827
NetJP2_1: JP2.1 U4.12 | length 77.9
  Top Layer w0.3: U4.12 v1(27.4,49.45)
  Top Layer w0.5: v1(45.2,15.6) 46.53,16.93 JP2.1
  Bottom Layer w0.5: v1(27.4,49.45) 32.15,49.45 33.7,51 35.2,51 37.7,48.5 54.281,48.5 57.2,45.581 57.2,18.4 54,15.2 45.6,15.2 v1(45.2,15.6)
NetJP2_2: JP2.2 U8.3 | length 15.3
  Top Layer w0.5: U8.3 41.1,13.3 45.3,17.5 45.3,18.7 45.8,19.2 JP2.2
NetJP3_1: JP3.1 U4.13 | length 68.1
  Top Layer w0.3: U4.13 27.125,48.8 27.8,48.125 v1(27.8,47.55)
  Top Layer w0.5: JP3.1 49.07,16.793 49.363,16.5 v1(51,16.5)
  Bottom Layer w0.5: v1(27.8,47.55) 53.75,47.55 56.2,45.1 56.2,18.7 54,16.5 v1(51,16.5)
NetJP3_2: JP3.2 U8.2 | length 18.9
  Top Layer w0.5: U8.2 43.5,12.2 47.8,16.5 47.8,18.75 48.25,19.2 JP3.2
NetR1_1: R1.1 T1.3 | length 2
  Top Layer w0.3: R1.1 11.2,15.425 12.025,14.6 T1.3
NetR2_1: R2.1 T1.4 U6.5 U8.14 | length 15
  Top Layer w0.3: T1.4 15.134,14.6 15.725,14.009 R2.1
  Top Layer w0.5: R2.1 16.5,14.009 17.1,14.609 17.1,15.3 17.6,15.8 23,15.8 23.45,15.35 23.491,15.35 ; U6.5 21.454,13.869 22.26,13.869 23.491,15.1 23.491,15.35 ; U8.14 24.75,15.35 23.491,15.35
NetR2_2: R2.2 T1.5 T1.6 | length 1.9
  Top Layer w0.3: T1.5 T1.6 15.791,15.6 R2.2
NetR3_2: R3.2 R4.2 SB5.1 | length 2.8
  Top Layer w0.5: R3.2 R4.2 124.846,39.761 124.971,39.636 SB5.1
NetR5_2: R5.2 R6.2 SB6.1 | length 2.8
  Top Layer w0.5: R5.2 R6.2 124.853,38.131 SB6.1
NetSB7_2: SB7.2 U8.9 | length 3.5
  Top Layer w0.5: SB7.2 33.9,21.8 34.4,21.3 U8.9
NetSB8_1: SB8.1 U8.18 | length 14.3
  Top Layer w0.5: U8.18 26.89,11.1 27.941,12.15 27.941,20.066 27.456,20.55 27.44,20.55 26.572,21.418 26.572,21.706 26.657,21.791 SB8.1
NetT1_2: T1.2 U8.13 | length 12.9
  Top Layer w0.3: T1.2 13.104,15.1 13.514,15.511
  Top Layer w0.5: 13.514,15.511 13.514,15.714 14.4,16.6 U8.13
NetU1_10: U1.10 U2.11 | length 6
  Top Layer w0.2: U2.11 110.792,34.413
  Top Layer w0.3: 110.792,34.413 110.792,37.328 111.51,38.046 U1.10@112.518,38.046
  Top Layer w0.4: U1.10@112.518,38.046 U1.10
NetU1_12: U1.12 U2.15 | length 8.3
  Top Layer w0.2: v1(108.568,34.413) 108.792,34.19 U2.15
  Top Layer w0.3: v1(111.118,38.923) 111.491,39.296 112.468,39.296 U1.12
  Bottom Layer w0.5: v1(108.568,34.413) 108.568,36.373 v1(111.118,38.923)
NetU1_13: U1.13 U2.14 | length 10
  Top Layer w0.2: U2.14 109.292,34.262 v1(109.443,34.413)
  Top Layer w0.3: v1(111.118,39.923) 111.216,40.021 U1.13
  Bottom Layer w0.5: v1(109.443,34.413) 112.108,37.078 112.108,39.611 111.815,39.904 111.138,39.904 v1(111.118,39.923) v1@111.118,39.913
NetU1_14: U1.14 U2.12 | length 9.3
  Top Layer w0.2: U2.12 110.292,34.413
  Top Layer w0.3: 110.292,34.413 110.292,40.16 110.728,40.596 112.468,40.596 U1.14
NetU1_16: U1.16 U2.16 | length 12.5
  Top Layer w0.3: U2.16 107.892,36.547 108.568,37.224 108.568,39.836 110.703,41.971 U1.16
NetU2_19: U2.19 U3.1 | length 20.4
  Top Layer w0.2: 106.918,31.223 107.182,30.96 U2.19
  Top Layer w0.3: 105.618,31.223 106.918,31.223
  Top Layer w0.5: U3.1 91.377,24.088 91.427,24.138 91.427,25.138 93.462,27.173 101.268,27.173 105.318,31.223 105.618,31.223
NetU2_20: U2.20 U3.4 | length 24.2
  Top Layer w0.2: 107.892,29.56 U2.20
  Top Layer w0.5: U3.4 92.7,20.278 94.4,21.978 94.4,25.148 95.4,26.148 105.84,26.148 107.892,28.2 107.892,29.56
NetU6_6: U6.6 U8.5 | length 22.5
  Top Layer w0.5: U6.6 21.354,14.769 20.719,14.769 20.4,14.45 20.4,11.8 22,10.2 28.2,10.2 29.3,11.3 29.3,14.359 30.441,15.5 U8.5
Vin: C11.1 J4.2 L2.1 SB1.1 | length 180.9
  Top Layer w0.5: v1(133.607,31) 133.626,31.019 134.594,31.019 135,31.425 SB1.1
  Top Layer w1: J4.2 14.7,35.4 15.8,36.5 C11.1 19.016,36.325 20.68,36.325 21.491,35.514 21.491,35.2 L2.1
  Bottom Layer w1: J4.2@12.12,35.4 12.12,39.78 8.4,43.5 8.4,58.6 10.5,60.7 103.959,60.7 112.05,52.609 112.05,48.25 113.1,47.2 121.1,47.2 133.607,34.693 v1(133.607,31)
pads on no net: B1.P1.3 B1.P1.5 B1.P1.8 B1.P2.1 B1.P3.1 B1.P3.2 B1.P3.3 B1.P3.4 B1.P3.5 B1.P3.6 B1.P3.7 B1.P3.8 B1.P5.1 B1.P5.2 B1.P5.3 B1.P5.4 B1.P5.5 B1.P5.6 B1.P6.1 B1.P6.2 B1.P6.3 B1.P6.4 B1.P6.5 B1.P6.6 B1.P6.7 B1.P6.8 B1.P20.1 B1.P20.2 B1.P20.3 B1.P20.4 B1.P20.5 B1.P20.6 B1.P20.7 B1.P20.8 B1.P20.10 B1.P20.11 B1.P20.12 B1.P20.13 B1.P24.1 B1.P24.2 B1.P24.3 B1.P24.4 B1.P24.5 B1.P24.6 B1.P24.7 B1.P24.8 B1.P24.9 B1.P24.10 B1.P24.11 B1.P24.12 B1.P24.13 B1.P24.14 B1.P24.15 B1.P24.16 B1.P24.17 B1.P24.18 J1.1 J1.2 J1.5 J1.7 J2.1 J2.2 J2.5 J2.7 J4.0 J7.0 J7.1 J7.8 Mec1.0 Mec2.0 Mec3.0 Mec4.0 Mec5.0 Mec6.0 U1.6 U1.11 U2.1 U2.2 U2.3 U2.4 U2.5 U2.9 U2.10 U2.13 U3.5 U3.8 U4.6 U4.9 U6.4 U7.6 U7.9 U8.4 U8.6 U8.15 U8.16 U8.17

## Polygon pours and split planes (outlines as drawn)
GND on Bottom Layer "GND_L04_P001" (solid, remove dead copper, pour order 1): 0,62.527 cw(c0.973,62.527) 0.973,63.5 135.5,63.5 cw(c135.5,62.5) 136.5,62.5 136.5,27.925 cw(c135.531,27.925) 135.531,26.956 121.332,26.956 ccw(c121.332,25.686) 120.062,25.686 120.062,1.275 cw(c118.787,1.275) 118.787,0 0.916,0 cw(c0.916,0.916) 0,0.916
GND on Top Layer "GND_L01_P000" (solid, remove dead copper, pour order 0): 0,62.527 cw(c0.973,62.527) 0.973,63.5 135.484,63.5 cw(c135.484,62.484) 136.5,62.484 136.5,27.925 cw(c135.531,27.925) 135.531,26.956 121.332,26.956 ccw(c121.332,25.686) 120.062,25.686 120.062,1.268 cw(c118.794,1.268) 118.794,0 1.016,0 cw(c1.016,1.016) 0,1.016
+3.3 on Internal Plane 2 (split plane): 135.614,63.369 135.727,63.347 135.836,63.31 135.938,63.259 136.034,63.196 136.12,63.12 136.196,63.034 136.259,62.938 136.31,62.836 136.347,62.727 136.369,62.614 136.376,62.508 136.368,62.508 136.364,62.5 136.375,62.5 136.376,62.508 136.376,62.504 136.376,62.5 136.375,62.5 136.376,62.497 136.375,62.492 136.376,62.487 136.375,62.484 136.365,62.484 136.368,62.476 136.375,62.476 136.375,28.188 136.375,27.925 136.376,27.918 136.369,27.815 136.348,27.706 136.312,27.602 136.263,27.502 136.202,27.41 136.129,27.327 136.046,27.254 135.954,27.193 135.855,27.144 135.75,27.109 135.642,27.087 135.539,27.08 135.531,27.081 121.332,27.081 121.175,27.072 121.021,27.046 120.871,27.003 120.726,26.943 120.589,26.867 120.462,26.777 120.345,26.673 120.241,26.556 120.151,26.429 120.075,26.292 120.015,26.147 119.972,25.997 119.946,25.843 119.937,25.686 119.937,1.27 119.938,1.259 119.929,1.12 119.9,0.973 119.852,0.831 119.785,0.696 119.702,0.572 119.603,0.459 119.49,0.36 119.365,0.276 119.231,0.21 119.089,0.162 118.941,0.133 118.802,0.123 118.792,0.125 1.016,0.125 1.009,0.124 0.9,0.131 0.785,0.154 0.675,0.191 0.57,0.243 0.473,0.308 0.385,0.385 0.308,0.473 0.243,0.57 0.191,0.675 0.154,0.785 0.131,0.9 0.124,1.009 0.125,1.016 0.125,62.527 0.124,62.535 0.131,62.638 0.152,62.747 0.188,62.852 0.237,62.952 0.299,63.044 0.372,63.128 0.456,63.201 0.548,63.263 0.648,63.312 0.753,63.348 0.862,63.369 0.965,63.376 0.973,63.375 135.5,63.375 135.508,63.376
GND on Internal Plane 1 (split plane): 135.614,63.369 135.727,63.347 135.836,63.31 135.938,63.259 136.034,63.196 136.12,63.12 136.196,63.034 136.259,62.938 136.31,62.836 136.347,62.727 136.369,62.614 136.376,62.508 136.368,62.508 136.364,62.5 136.375,62.5 136.376,62.508 136.376,62.504 136.376,62.5 136.375,62.5 136.376,62.497 136.375,62.492 136.376,62.487 136.375,62.484 136.365,62.484 136.368,62.476 136.375,62.476 136.375,28.188 136.375,27.925 136.376,27.918 136.369,27.815 136.348,27.706 136.312,27.602 136.263,27.502 136.202,27.41 136.129,27.327 136.046,27.254 135.954,27.193 135.855,27.144 135.75,27.109 135.642,27.087 135.539,27.08 135.531,27.081 121.332,27.081 121.175,27.072 121.021,27.046 120.871,27.003 120.726,26.943 120.589,26.867 120.462,26.777 120.345,26.673 120.241,26.556 120.151,26.429 120.075,26.292 120.015,26.147 119.972,25.997 119.946,25.843 119.937,25.686 119.937,1.27 119.938,1.259 119.929,1.12 119.9,0.973 119.852,0.831 119.785,0.696 119.702,0.572 119.603,0.459 119.49,0.36 119.365,0.276 119.231,0.21 119.089,0.162 118.941,0.133 118.802,0.123 118.792,0.125 1.016,0.125 1.009,0.124 0.9,0.131 0.785,0.154 0.675,0.191 0.57,0.243 0.473,0.308 0.385,0.385 0.308,0.473 0.243,0.57 0.191,0.675 0.154,0.785 0.131,0.9 0.124,1.009 0.125,1.016 0.125,62.527 0.124,62.535 0.131,62.638 0.152,62.747 0.188,62.852 0.237,62.952 0.299,63.044 0.372,63.128 0.456,63.201 0.548,63.263 0.648,63.312 0.753,63.348 0.862,63.369 0.965,63.376 0.973,63.375 135.5,63.375 135.508,63.376

## Silkscreen, mask and mechanical layers (free items; w line width, h text height)
Top Overlay:
  drawing of 3 lines, arcs and shapes, not listed
  text "Telemetry Board" at 59.1,50.3 h1.5
  text ".PcbDesigner" at 59.1,47.6 h1.5
  text ".PcbDate" at 59.1,44.8 h1.5
Mechanical 1:
  lines w0.254: 136.5,28.188 136.5,27.925 ; 136.5,62.484 136.5,27.925 ; 136.5,62.5 ccw(c135.5,62.5) 135.5,63.5 0.973,63.5 ccw(c0.973,62.527) 0,62.527 0,1.016 ccw(c1.016,1.016) 1.016,0 90.709,0 118.043,0 118.792,0 ccw(c118.792,1.27) 120.062,1.27 120.062,25.686 cw(c121.332,25.686) 121.332,26.956 135.531,26.956 ccw(c135.531,27.925) 136.5,27.925
Bottom Courtyard:
  lines w0.254: 118.785,0 118.787,0 ; 118.787,0 ccw(c118.787,0) 118.787,0

## Text inside footprints (layer, text, board x,y; h text height)
B1: Bottom Overlay "P5" at 61.976,36.83 h1.5 r90; Bottom Overlay "P24" at 92.456,54.61 h1.5 r90; Bottom Overlay "P4" at 42.927,54.102 h1.5 r90; Bottom Overlay "P3" at 64.771,54.102 h1.5 r90; Bottom Overlay "P6" at 87.631,54.102 h1.5 r90; Bottom Overlay "P1" at 27.701,6 h1.5 r90; Bottom Overlay "P2" at 50.501,6 h1.5 r90; Bottom Overlay "P20" at 18.501,44.1 h1.5 r90